# Altium PCB EnvUnitPCB.PcbDoc (part 3 of 4)
Units mm, origin at the board's own origin, x right, y up, seen from the top; angles counter-clockwise.
Board outline 110.5 x 67 mm, 4 copper layers (TOP, GND, VCC, BOT), stack 1.586 mm thick; 184 components, 135 nets, 655 pads, 1338 vias.
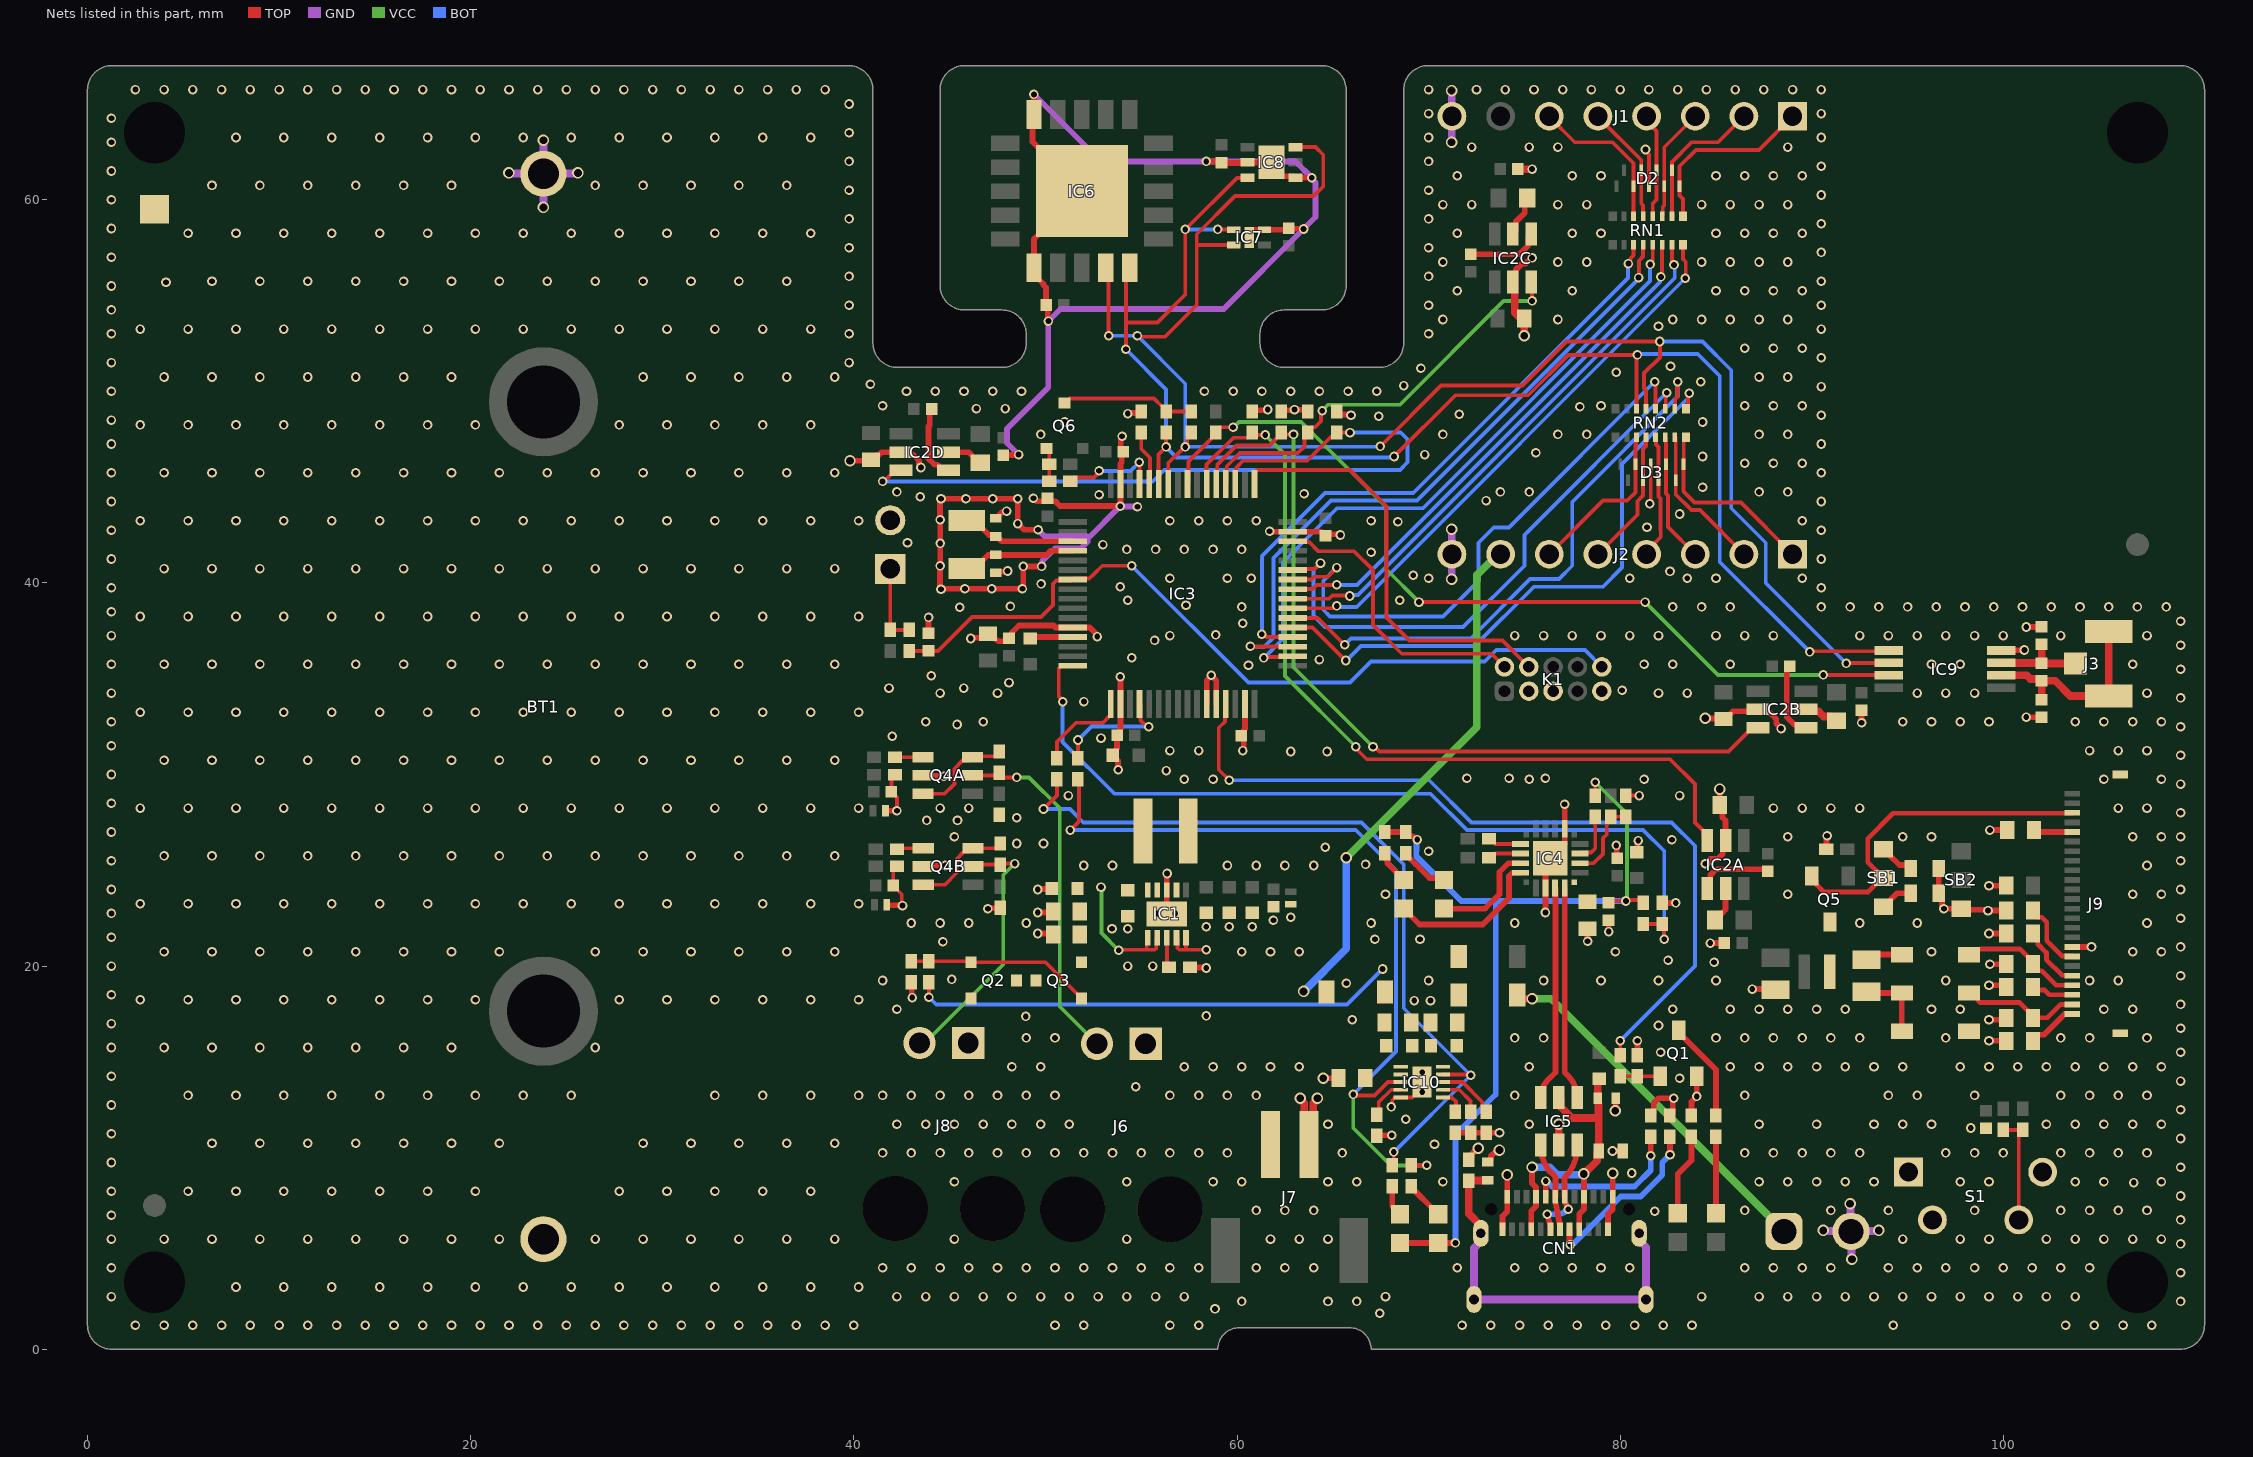
[diagram p5: the nets of this part, all layers, seen from the top]

## Via types
v1: diameter 0.5, hole 0.3, TOP to BOT, tented both sides, 1301 vias
v2: diameter 0.6, hole 0.4, TOP to BOT, tented both sides, 37 vias

## Nets (pads, with @x,y where several pads share a name; then routed paths per layer and width w, separated by ;. In a path a pad name is that pad's centre, name@x,y a point inside that pad or via, vN(x,y) a via of type N, cw(c..) or ccw(c..) an arc to the next point about the centre after c; other vN are vias at no path point) (continued)
GND: *BM1.1 BT1.MH2 C1.1 C2.2 C3.2 C4.2 C5.2 C6A.1 C6B.1 C6C.1 C6D.1 C8A.1 C8B.1 C8C.1 C8D.1 C9.2 C10.1 C11.1 C12.1 C13.1 C14.1 C15.2 C16.2 C17.1 C18.1 C19.2 C20.1 C21.1 C22.2 C23.1 C24.1 C25.1 C26.1 C28.2 C29.1 C30.1 C31.2 C32.2 C33.2 C34.2 C35.2 C36.2 C37.2 C38.2 C39A.1 C39B.1 C41.2 C42.2 C43.2 C44.2 C45.2 C46.2 C47.2 C48.2 C49.2 C50.1 C51.2 CN1.A1 CN1.A12 CN1.B1 CN1.B12 D1.2 D2.3 D3.3 D6.2 D11A.2 D11B.2 D14.1 IC1.4 IC1.5 IC1.8 IC1.11 IC2A.2 IC2B.2 IC2C.2 IC2D.2 IC3.12 IC3.18 IC3.27 IC3.28 IC3.31 IC3.47 IC3.63 IC4.3 IC4.12 IC4.21 IC5.2 IC6.6 IC6.20 IC6.21 IC7.4 IC7.5 IC8.2 IC8.4 IC8.7 IC9.4 IC10.5 IC10.11 J1.8 J2.8 J4.2 J5.2 J7.2 J9.17 J9.MP1 J9.MP2 K1.3 K1.5 K1.9 Q1.2 Q4A.5 Q4B.5 R1.1 R3.1 R4.1 R5.1 R11.1 R24.1 R27.2 R29.1 R30.1 R31.1 R32.1 R33.1 R34.2 R35.2 R36.1 R37.2 R40A.1 R40B.1 R41A.1 R41B.1 R42.1 R43.1 R44.1 R45.1 R46.2 S1.1 S1.2 S1.4 SB2.3 | length 245.9
  TOP w0.2: C39A.1@41.96,29.092 41.96,29.09 42.25,28.8 v1(42.25,28.114) ; C39A.1@41.96,29.1 41.96,29.81 R41A.1@42.15,30 ; R41B.1@42.25,25.2 42.06,25.01 C39B.1@42.06,24.2 42.06,24.19 42.5,23.75 v1@42.5,23.2 ; IC1.4@56.839,21.472 56.889,21.422 56.889,20.948 56.987,20.85 57.3,20.85 ; IC1.5@57.339,21.472 57.339,20.889 57.3,20.85 ; v1(58.4,20.85) 57.3,20.85 ; v1(68.05,12.65) 68.101,12.701 68.101,13.001 68.25,13.15 IC10.5@68.55,13.15 69.15,13.15 69.423,13.423 v1(69.675,13.423) ; R11.1@80.3,28.9 v1(81,28.9) ; v1(81.324,62.624) 81.324,62.543 81.5,62.367 81.5,61.974 D2.3@81.5,60.676 ; v1(81.55,44.135) 81.6,44.185 D3.3@81.6,46.2
  TOP w0.3: v2(39.8,46.375) 40.85,46.375 C6D.1@40.9,46.425 41.125,46.65 41.27,46.65 41.445,46.825 IC2D.2@42.45,46.825 42.6,46.675 43.076,46.675 43.12,46.675 43.4,46.395 43.4,46.179 43.5,46.079 v1(43.5,46.025) ; D11A.2@41.65,28.1 41.657,28.107 42.243,28.107 v1(42.25,28.114) ; D11B.2@41.725,23.2 41.744,23.181 42.519,23.181 v1(42.539,23.161) ; R29.1@42.999,19.151 43.022,19.128 43.022,18.378 v1(43.045,18.355) ; Q4A.5@43.6,29.95 43.625,29.925 44.675,29.925 v1(44.7,29.9) ; Q4B.5@43.625,25.2 43.675,25.25 v1(44.775,25.25) ; C30.1@43.9,37.37 v1(43.9,38.2) ; v1(44.5,40.888) 44.5,39.779 44.55,39.729 v1(44.55,39.675) 44.575,39.7 v1(45.8,39.7) v1(47.2,39.7) v1(48.8,39.7) 48.838,39.738 v1(48.838,40.86) 48.838,40.887 48.865,40.86 v1(49.8,40.86) ; v1@44.513,40.888 v1(44.513,42.062) 44.506,42.069 44.506,43.294 v1(44.5,43.3) 44.5,44.296 44.55,44.346 v1(44.55,44.4) v1(45.85,44.4) v1(47.25,44.4) v1(48.55,44.4) ; v1(46.1,37.1) 46.138,37.138 46.788,37.138 C17.1@47,37.35 ; v1(47,23) 47.025,23.025 47.625,23.025 R40B.1@47.65,23.05 ; C17.1@47.095,37.25 47.296,37.125 47.577,36.95 47.94,36.95 C18.1@48.1,37.11 48.11,37.11 48.26,37.26 48.26,37.414 48.621,37.775 50.425,37.775 50.525,37.675 IC3.12@51.427,37.675 52.309,37.675 52.662,37.323 52.662,37.238 v1(52.7,37.2) ; C16.2@47.4,40.54 47.447,40.587 47.987,40.587 v1(48.025,40.625) ; C15.2@47.4,43.36 47.41,43.36 47.762,43.712 47.937,43.712 v1(47.975,43.75) ; C8D.1@47.8,46.665 47.817,46.683 48.583,46.683 v1(48.6,46.7) ; v1@48.554,44.396 v1(48.554,43.1) 48.879,42.775 v1(49.616,42.775) ; v1(49.375,44.425) 49.532,44.268 50.242,44.268 50.25,44.26 50.515,44.26 50.76,44.015 53.915,44.015 IC3.63@53.915,45.163 53.915,46.215 53.982,46.282 53.982,46.772 C12.1@54.06,46.85 53.926,46.984 53.926,47.522 54,47.596 v1(54,47.65) ; v1(49.4,65.5) 49.4,64.65 49.324,64.574 49.324,63.026 50.7,61.65 IC6.21@50.7,61.45 ; v1(49.6,21.7) 50.35,21.7 C32.2@50.4,21.65 ; v1(49.6,22.8) 50.35,22.8 C33.2@50.4,22.85 ; v1(49.6,24) 49.625,24.025 50.3,24.025 C31.2@50.325,24.05 ; C10.1@50.092,44.417 C10.1@50.1,44.41 ; v1(50.154,53.665) 50.116,53.704 50.116,54.414 50.03,54.5 50.03,55.425 49.9,55.555 49.9,55.6 49.4,56.1 IC6.6@49.4,56.45 49.4,57.95 IC6.21@51.9,60.45 ; v1(53.8,30.25) 53.784,30.266 53.784,30.716 53.525,30.975 C9.2@53.525,31 53.7,31.175 53.7,31.336 53.74,31.376 C13.1@53.74,32.05 53.89,32.2 53.89,32.361 53.915,32.386 IC3.18@53.915,33.687 53.915,35.085 v1(53.9,35.1) ; v1(53.9,44) v1@53.912,43.988 ; v1(54.3,48.838) 54.338,48.876 54.926,48.876 R3.1@55,48.95 ; v1@54.788,43.988 v1(54.8,43.975) ; v1(55.85,22.75) 56.047,22.75 56.075,22.722 IC1.11@56.339,22.722 IC1.8@56.339,23.972 56.339,24.821 v1(56.35,24.832) ; R1.1@57.55,19.95 57.575,19.925 58.375,19.925 v1(58.4,19.9) ; v1(58.4,62) 59.25,62 59.33,61.92 60.52,61.92 IC8.2@60.55,61.95 IC8.7@61.8,61.95 61.8,61.755 62.325,61.23 62.52,61.23 62.525,61.225 62.975,61.225 IC8.4@63.05,61.15 v1(63.9,61.15) ; IC3.27@58.415,33.687 58.415,34.911 58.657,35.153 v1(58.657,35.186) 58.657,35.168 58.915,34.911 IC3.28@58.915,33.687 ; C11.1@60.201,32.05 60.351,32.2 60.351,32.322 60.415,32.386 IC3.31@60.415,33.687 ; C11.1@60.229,32.022 60.346,31.905 60.346,31.35 60.3,31.304 v1(60.3,31.25) ; IC7.5@60.637,58.041 IC7.5@60.637,58.041 60.637,58.341 60.737,58.441 IC7.4@61.437,58.441 62.631,58.441 C24.1@62.682,58.492 ; R33.1@60.8,48.95 60.863,49.013 61.562,49.013 v1(61.6,49.051) ; v1(61.7,42.7) 61.725,42.675 IC3.47@62.903,42.675 64.409,42.675 64.618,42.467 C14.1@64.628,42.467 64.708,42.547 65.299,42.547 65.346,42.5 v1(65.4,42.5) ; R32.1@62.3,48.95 62.362,49.012 62.962,49.012 v1(63,49.05) ; C24.1@62.7,58.51 C24.1@62.682,58.492 ; v1(63,49.05) 63.017,49.034 63.616,49.034 R31.1@63.7,48.95 ; v1(63.476,58.474) 63.458,58.492 C24.1@62.682,58.492 ; v2(64.5,14.15) C38.2@65.3,14.15 ; R30.1@65.213,48.862 65.287,48.788 65.912,48.788 v1(65.95,48.75) ; R34.2@67.3,11.15 67.325,11.175 v1(68.075,11.175) ; R37.2@71.4,11.3 R36.1@72.2,11.3 R35.2@73,11.3 v1(73.7,11.3) ; R46.2@72.1,9.9 72.25,10.05 72.25,10.174 72.576,10.5 v2(72.6,10.5) ; C51.2@73.1,9.775 73.175,9.775 73.25,9.85 73.25,10.074 73.518,10.343 73.643,10.343 v2(73.7,10.4) ; CN1.B12@73.86,6.26 73.86,6.945 74.11,7.195 CN1.A1@74.11,7.96 74.11,9.09 v2(74.1,9.1) ; IC2C.2@74.5,55.609 74.551,55.66 74.551,56.351 74.858,56.658 75.04,56.658 75.346,56.963 v1(75.4,56.963) ; v1(76.1,22.8) 76.103,22.803 IC4.3@76.103,24.075 76.103,25.375 IC4.21@76.353,25.625 77.103,26.375 77.103,26.787 IC4.12@77.103,27.175 77.103,28.447 v1(77.1,28.45) ; IC5.2@76.682,10.768 IC5.2@76.8,10.65 ; v1(78.3,21.3) C22.2@78.3,21.95 ; CN1.B1@79.36,6.26 79.36,7.06 79.61,7.31 CN1.A12@79.61,7.96 79.61,9.19 v2(79.607,9.193) ; v1(79.4,21.8) C21.1@79.4,22.39 ; v1(79.6,10.35) D6.2@80.125,10.35 ; v2(79.75,12.45) 79.762,12.462 79.762,13.087 C50.1@79.775,13.1 ; v1(79.8,26.3) 79.824,26.276 79.824,25.736 C20.1@79.875,25.685 ; C19.2@80.875,25.95 80.906,25.981 80.906,26.519 v1(80.937,26.55) ; R24.1@80.9,15.35 v1(80.9,16.1) ; R4.1@81.6,12.2 81.75,12.35 81.75,12.85 82,13.1 v1(82.8,13.1) 82.8,13.046 82.75,12.996 82.75,12.35 R5.1@82.6,12.2 ; R45.1@82.2,23.3 v1(82.9,23.3) ; R27.2@83.717,12.2 83.717,12.917 v1(84,13.2) Q1.2@84,14.25 ; v1(84.453,25.347) 84.476,25.347 84.729,25.6 85.102,25.6 85.35,25.848 85.35,25.924 85.35,26.4 IC2A.2@85.5,26.55 85.5,27.6 85.341,27.759 85.341,28.359 C6A.1@85.2,28.5 ; v2@84.455,32.921 C6B.1@85.379,32.921 ; v1(84.7,21.2) C8A.1@85.44,21.2 ; C6A.1@85.2,28.4 C6A.1@85.2,28.5 ; v2(85.2,29.243) C6A.1@85.2,28.5 ; C6B.1@85.57,32.975 85.895,33.3 IC2B.2@87.1,33.3 ; v1(86.9,18.8) 88.07,18.8 C41.2@88.1,18.77 ; IC2B.2@87.2,33.4 IC2B.2@87.1,33.3 ; v1(88.4,32.4) 88.4,32.426 88.15,32.676 88.15,32.895 87.945,33.1 87.795,33.25 87.15,33.25 IC2B.2@87.1,33.3 ; R43.1@90.75,26.1 90.775,26.125 90.775,26.775 v1(90.8,26.8) ; v1(92.6,32.7) C8B.1@92.6,33.35 ; R42.1@96.625,25.1 R44.1@96.625,23.8 96.8,23.625 96.8,23.131 96.9,23.031 v1(96.9,23) SB2.3@97.8,23 97.862,22.938 99.162,22.938 v1(99.2,22.9) C44.2@100.15,22.9 ; v1(99.25,16.1) C49.2@100.15,16.1 ; v1(99.25,17.2) 100.05,17.2 C48.2@100.15,17.3 ; v1(99.25,19) 100.05,19 C47.2@100.15,18.9 ; v1(99.25,21.7) C45.2@100.15,21.7 ; v1(99.25,24.2) C43.2@100.15,24.2 ; v1(99.3,20.1) C46.2@100.15,20.1 ; v1(99.3,27.1) C42.2@100.2,27.1 ; IC9.4@99.888,36.475 99.9,36.487 101.087,36.487 v1(101.1,36.5) ; v1(101.2,33) 101.205,32.995 101.995,32.995 C26.1@102,32.99 ; v1(101.2,37.7) 101.205,37.705 101.995,37.705 C28.2@102,37.71 ; J9.17@103.6,21 v1(104.6,21)
  TOP w0.4: v2(63.3,13.1) 63.3,13.046 63.517,12.829 63.517,10.933 J7.2@63.75,10.7 63.983,10.933 63.983,12.829 64.187,13.033 v2@64.187,13.1 ; IC2C.2@74.401,55.708 74.5,55.609 74.5,54.095 C6C.1@75,53.595 ; C8C.1@74.66,61.6 v1(75.4,61.6) ; v2(75,52.9) C6C.1@75,53.8 C6C.1@75,53.895 ; IC5.2@76.8,10.65 v2(76.8,11.75)
  GND w0.3: v1(48.6,46.7) 48,47.3 48,48.049 50.15,50.199 50.15,53.661 v1(50.154,53.665) 50.793,54.304 59.305,54.304 v1(63.476,58.474) 64.1,59.099 64.1,60.896 63.9,61.096 v1(63.9,61.15) 63.05,62 v1(58.4,62) 52.9,62 v1(49.4,65.5) ; v1(49.616,42.775) 49.966,42.425 52.2,42.425 52.2,42.3 ; v1(49.8,40.86) 49.838,40.898 49.838,41.138 50.5,41.8 51.849,41.8 52.2,42.151 52.2,42.3 ; v1(54.8,43.975) 54.788,43.988 53.912,43.988 v1(53.9,44) 52.2,42.3
  GND w0.4: v2(22,61.4) 22.025,61.375 23.775,61.375 BT1.MH2@23.8,61.35 ; v2(23.8,59.6) BT1.MH2@23.8,61.35 ; v2(23.8,63.1) BT1.MH2@23.8,61.35 ; v2(25.6,61.4) 25.575,61.375 23.825,61.375 BT1.MH2@23.8,61.35 ; v2(71.2,40.2) 71.21,40.21 71.21,41.49 J2.8@71.22,41.5 71.21,41.51 71.21,42.79 v2(71.2,42.8) ; v2(71.2,63) 71.21,63.01 71.21,64.35 J1.8@71.22,64.36 71.21,64.37 71.21,65.69 v2(71.2,65.7) ; v2(90.6,6.2) 90.625,6.175 J5.2@92.025,6.175 ; v2(92,7.6) 92.025,7.575 J5.2@92.025,6.175 ; v2(92.1,4.7) 92.075,4.725 92.075,6.125 J5.2@92.05,6.15 ; v2(93.5,6.2) 93.475,6.175 92.075,6.175 J5.2@92.05,6.15 ; J5.2@92.025,6.175 J5.2@92.05,6.15
  BOT w0.3: v1(53.9,44) v1@53.912,43.988 ; v1@54.788,43.988 v1(54.8,43.975)
  other v1: 2.5,1.25 4,1.25 5.5,1.25 7,1.25 8.5,1.25 10,1.25 11.5,1.25 13,1.25 14.5,1.25 16,1.25 17.5,1.25 19,1.25 20.5,1.25 22,1.25 23.5,1.25 25,1.25 26.5,1.25 28,1.25 29.5,1.25 31,1.25 32.5,1.25 34,1.25 35.5,1.25 37,1.25 38.5,1.25 40,1.25 50.5,1.25 52,1.25 56.5,1.25 58,1.25 71.75,1.25 73.25,1.25 74.75,1.25 76.25,1.25 77.75,1.25 79.25,1.25 80.75,1.25 82.25,1.25 83.75,1.25 94.25,1.25 103.25,1.25 104.75,1.25 106.25,1.25 107.75,1.25 67.445,1.88 58.849,2.105 60.25,2.5 64.75,2.5 66.25,2.5 109.25,2.5 1.25,2.75 42.25,2.75 43.75,2.75 45.25,2.75 46.75,2.75 48.25,2.75 49.75,2.75 51.25,2.75 52.75,2.75 54.25,2.75 55.75,2.75 57.25,2.75 67.75,2.75 84.25,2.75 87.25,2.75 88.75,2.75 90.25,2.75 91.75,2.75 93.25,2.75 94.75,2.75 96.25,2.75 97.75,2.75 99.25,2.75 100.75,2.75 102.25,2.75 103.75,2.75 7.75,3.25 10.25,3.25 12.75,3.25 15.25,3.25 17.75,3.25 20.25,3.25 22.75,3.25 25.25,3.25 27.75,3.25 30.25,3.25 32.75,3.25 35.25,3.25 37.75,3.25 40.25,3.25 109.25,4 1.25,4.25 41.5,4.25 43,4.25 44.5,4.25 46,4.25 47.5,4.25 49,4.25 50.5,4.25 52,4.25 53.5,4.25 55,4.25 56.5,4.25 58,4.25 61,4.25 62.5,4.25 64,4.25 71.5,4.25 74.5,4.25 76,4.25 77.5,4.25 79,4.25 80.5,4.25 86.5,4.25 88,4.25 89.5,4.25 91,4.25 94,4.25 95.5,4.25 97,4.25 98.5,4.25 100,4.25 101.5,4.25 103,4.25 104.5,4.25 109.25,5.5 1.25,5.75 4,5.75 6.5,5.75 9,5.75 11.5,5.75 14,5.75 16.5,5.75 19,5.75 21.5,5.75 26.5,5.75 29,5.75 31.5,5.75 34,5.75 36.5,5.75 39,5.75 45.25,5.75 54.25,5.75 61.75,5.75 63.25,5.75 64.75,5.75 94.75,5.75 97.75,5.75 99.25,5.75 102.25,5.75 103.75,5.75 105.25,5.75 106.75,5.75 108.25,5.75 109.25,6.75 1.25,7 81.811,7.206 61,7.25 62.5,7.25 64,7.25 86.5,7.25 91,7.25 94,7.25 98.5,7.25 103,7.25 104.5,7.25 106,7.25 107.5,7.25 109.25,8 1.25,8.25 5.25,8.25 7.75,8.25 10.25,8.25 12.75,8.25 15.25,8.25 17.75,8.25 20.25,8.25 27.75,8.25 30.25,8.25 32.75,8.25 35.25,8.25 37.75,8.25 106.8,8.7 45.25,8.75 54.25,8.75 58.75,8.75 60.25,8.75 64.75,8.75 66.25,8.75 70.75,8.75 87.25,8.75 88.75,8.75 90.25,8.75 91.75,8.75 93.25,8.75 97.75,8.75 99.25,8.75 103.75,8.75 105.25,8.75 108.25,8.75 80.6,9.2 109.25,9.5 1.25,9.75 41.5,10.25 43,10.25 44.5,10.25 46,10.25 47.5,10.25 49,10.25 50.5,10.25 52,10.25 53.5,10.25 55,10.25 56.5,10.25 58,10.25 59.5,10.25 65.5,10.25 86.5,10.25 88,10.25 89.5,10.25 91,10.25 92.5,10.25 97,10.25 98.5,10.25 100,10.25 103,10.25 104.5,10.25 106,10.25 107.5,10.25 70.311,10.706 6.5,10.75 9,10.75 11.5,10.75 14,10.75 16.5,10.75 19,10.75 21.5,10.75 29,10.75 31.5,10.75 34,10.75 36.5,10.75 39,10.75 109.25,11 1.25,11.25 98.3,11.55 42.25,11.75 43.75,11.75 45.25,11.75 46.75,11.75 48.25,11.75 49.75,11.75 51.25,11.75 64.75,11.75 75.25,11.75 87.25,11.75 90.25,11.75 93.25,11.75 94.75,11.75 96.25,11.75 102.25,11.75 103.75,11.75 105.25,11.75 106.75,11.75 108.25,11.75 68.811,12.006 109.25,12.5 1.25,12.75 5.25,13.25 7.75,13.25 10.25,13.25 12.75,13.25 15.25,13.25 17.75,13.25 20.25,13.25 22.75,13.25 25.25,13.25 32.75,13.25 35.25,13.25 37.75,13.25 40.25,13.25 41.5,13.25 43,13.25 44.5,13.25 46,13.25 47.5,13.25 49,13.25 50.5,13.25 56.5,13.25 58,13.25 59.5,13.25 61,13.25 74.5,13.25 86.5,13.25 94,13.25 95.5,13.25 98.5,13.25 103,13.25 104.5,13.25 106,13.25 107.5,13.25 54.711,13.706 109.25,14 83.1,14.15 1.25,14.25 69.675,14.462 48.25,14.75 49.75,14.75 57.25,14.75 58.75,14.75 60.25,14.75 61.75,14.75 63.25,14.75 75.25,14.75 85.75,14.75 87.25,14.75 88.75,14.75 90.25,14.75 91.75,14.75 93.25,14.75 94.75,14.75 97.75,14.75 99.25,14.75 100.75,14.75 102.25,14.75 103.75,14.75 105.25,14.75 106.75,14.75 108.25,14.75 82.111,15.506 109.25,15.5 1.25,15.75 4,15.75 6.5,15.75 9,15.75 11.5,15.75 14,15.75 16.5,15.75 19,15.75 26.5,15.75 49,16.25 50.5,16.25 74.5,16.25 76,16.25 85,16.25 86.5,16.25 88,16.25 89.5,16.25 91,16.25 92.5,16.25 97,16.25 103,16.25 104.5,16.25 107.5,16.25 109.25,16.75 82,16.9 1.25,17 66.011,17.206 48.975,17.375 58.4,17.4 42.25,17.75 82.75,17.75 85.75,17.75 87.25,17.75 88.75,17.75 90.25,17.75 91.75,17.75 96.25,17.75 97.75,17.75 105.25,17.75 106.75,17.75 109.25,18 69.25,18.2 70.1,18.2 2.75,18.25 5.25,18.25 7.75,18.25 10.25,18.25 12.75,18.25 15.25,18.25 17.75,18.25 20.25,18.25 27.75,18.25 30.25,18.25 32.75,18.25 35.25,18.25 37.75,18.25 40.25,18.25 1.25,18.5 65.711,19.106 41.5,19.25 70,19.25 76,19.25 79,19.25 82,19.25 85,19.25 97,19.25 104.5,19.25 106,19.25 45.111,19.306 109.25,19.5 1.25,20 54.3,20 55.6,20 84.9,20.2 82.5,20.3 4,20.75 6.5,20.75 9,20.75 11.5,20.75 14,20.75 16.5,20.75 19,20.75 21.5,20.75 26.5,20.75 29,20.75 31.5,20.75 34,20.75 36.5,20.75 39,20.75 60.25,20.75 61.75,20.75 63.25,20.75 79.75,20.75 96.25,20.75 106.75,20.75 108.25,20.75 109.25,21 44.65,21.275 67.2,21.4 69.55,21.4 1.25,21.5 53.475,21.95 54.3,21.95 58.4,22.05 59.6,22.05 60.8,22.05 43,22.25 44.5,22.25 46,22.25 49,22.25 67,22.25 74.5,22.25 92.5,22.25 95.5,22.25 107.5,22.25 61.9,22.4 109.25,22.5 62.8,22.55 1.25,22.75 56.775,22.75 2.75,23.25 5.25,23.25 7.75,23.25 10.25,23.25 12.75,23.25 15.25,23.25 17.75,23.25 20.25,23.25 22.75,23.25 25.25,23.25 27.75,23.25 30.25,23.25 32.75,23.25 35.25,23.25 37.75,23.25 40.25,23.25 67.75,23.75 88.75,23.75 106.75,23.75 108.25,23.75 1.25,24 109.25,24 52,25.25 53.5,25.25 59.5,25.25 61,25.25 62.5,25.25 64,25.25 107.5,25.25 66.711,25.306 1.25,25.5 109.25,25.5 4,25.75 6.5,25.75 9,25.75 11.5,25.75 14,25.75 16.5,25.75 19,25.75 21.5,25.75 24,25.75 26.5,25.75 29,25.75 31.5,25.75 34,25.75 36.5,25.75 39,25.75 70,26 64.611,26.206 48.5,26.4 49.9,26.4 82.7,26.6 45.25,26.75 88.75,26.75 94.75,26.75 96.25,26.75 106.75,26.75 108.25,26.75 109.25,26.75 1.25,27 43.811,27.606 45.411,27.606 48.5,27.75 109.25,28 2.75,28.25 5.25,28.25 7.75,28.25 10.25,28.25 12.75,28.25 15.25,28.25 17.75,28.25 20.25,28.25 22.75,28.25 25.25,28.25 27.75,28.25 30.25,28.25 32.75,28.25 35.25,28.25 37.75,28.25 40.25,28.25 44.5,28.25 46,28.25 88,28.25 89.5,28.25 91,28.25 92.5,28.25 106,28.25 107.5,28.25 1.25,28.5 51.2,28.9 83.1,28.9 109.25,29.5 57.25,29.75 58.75,29.75 75.25,29.75 81.25,29.75 105.25,29.75 108.25,29.75 72,29.8 74.2,29.8 76.1,29.8 1.25,30 56.311,30.206 4,30.75 6.5,30.75 9,30.75 11.5,30.75 14,30.75 16.5,30.75 19,30.75 21.5,30.75 24,30.75 26.5,30.75 29,30.75 31.5,30.75 34,30.75 36.5,30.75 39,30.75 109.25,31 62.8,31.2 64.7,31.2 56.5,31.25 58,31.25 104.5,31.25 106,31.25 107.5,31.25 1.25,31.5 52.9,31.9 42,32 109.25,32.5 45.389,32.611 1.25,32.75 43.75,32.75 46.75,32.75 94.75,32.75 96.25,32.75 97.75,32.75 99.25,32.75 103.75,32.75 105.25,32.75 106.75,32.75 108.25,32.75 2.75,33.25 5.25,33.25 7.75,33.25 10.25,33.25 12.75,33.25 15.25,33.25 17.75,33.25 20.25,33.25 22.75,33.25 25.25,33.25 27.75,33.25 30.25,33.25 32.75,33.25 35.25,33.25 37.75,33.25 40.25,33.25 52.011,33.806 109.25,34 1.25,34.25 44.5,34.25 47.5,34.25 82,34.25 83.5,34.25 95.5,34.25 97,34.25 98.5,34.25 107.5,34.25 80.1,34.4 41.836,34.514 45.736,34.514 48.1,34.8 44.039,35.161 109.25,35.5 60.6,35.7 1.25,35.75 4,35.75 6.5,35.75 9,35.75 11.5,35.75 14,35.75 16.5,35.75 19,35.75 21.5,35.75 24,35.75 26.5,35.75 29,35.75 31.5,35.75 34,35.75 36.5,35.75 39,35.75 81.25,35.75 82.75,35.75 85.75,35.75 96.25,35.75 97.75,35.75 106.75,35.75 64.3,36 54.5,36.1 109.25,36.75 55.7,37 1.25,37.25 56.5,37.25 74.5,37.25 76,37.25 77.5,37.25 79,37.25 80.5,37.25 82,37.25 85,37.25 86.5,37.25 88,37.25 92.5,37.25 94,37.25 95.5,37.25 97,37.25 98.5,37.25 100,37.25 103,37.25 107.5,37.25 58.891,37.287 60.3,37.9 109.25,38 2.75,38.25 5.25,38.25 7.75,38.25 10.25,38.25 12.75,38.25 15.25,38.25 17.75,38.25 20.25,38.25 22.75,38.25 25.25,38.25 27.75,38.25 30.25,38.25 32.75,38.25 35.25,38.25 37.75,38.25 40.25,38.25 1.25,38.5 45.525,38.725 60.25,38.75 82.75,38.75 84.25,38.75 85.75,38.75 90.5,38.75 92,38.75 93.5,38.75 95,38.75 96.5,38.75 98,38.75 99.5,38.75 101,38.75 102.5,38.75 104,38.75 105.5,38.75 107,38.75 108.5,38.75 48.175,38.775 57.339,38.839 54.3,39.1 68.5,39.1 1.25,39.75 90.5,39.75 53.911,39.806 49.775,39.95 56.5,40.25 59.5,40.25 60.747,40.25 70,40.25 80.5,40.25 83.5,40.25 85,40.25 89.5,40.25 69.2,40.4 82.6,40.6 4,40.75 6.5,40.75 9,40.75 11.5,40.75 14,40.75 16.5,40.75 19,40.75 21.5,40.75 24,40.75 26.5,40.75 29,40.75 31.5,40.75 34,40.75 36.5,40.75 39,40.75 1.25,41.25 90.5,41.25 67,41.6 54.25,41.75 55.75,41.75 57.25,41.75 58.75,41.75 60.25,41.75 53,42 42.8,42.1 1.25,42.75 90.5,42.75 81.4,42.9 68.4,43.2 2.75,43.25 5.25,43.25 7.75,43.25 10.25,43.25 12.75,43.25 15.25,43.25 17.75,43.25 20.25,43.25 22.75,43.25 25.25,43.25 27.75,43.25 30.25,43.25 32.75,43.25 35.25,43.25 37.75,43.25 40.25,43.25 56.5,43.25 58,43.25 59.5,43.25 61,43.25 67,43.25 89.5,43.25 83.1,43.6 1.25,44.25 90.5,44.25 73,44.3 43.461,44.496 52.8,44.6 63.5,44.65 42.25,44.75 73.75,44.75 75.25,44.75 87.25,44.75 88.75,44.75 84.3,45 1.25,45.75 4,45.75 6.5,45.75 9,45.75 11.5,45.75 14,45.75 16.5,45.75 19,45.75 21.5,45.75 24,45.75 26.5,45.75 29,45.75 31.5,45.75 34,45.75 36.5,45.75 39,45.75 90.5,45.75 86.5,46.25 88,46.25 89.5,46.25 84.3,46.6 69.8,46.7 75.6,46.8 1.25,47.25 90.5,47.25 49.75,47.75 70.75,47.75 76.75,47.75 78.25,47.75 87.25,47.75 88.75,47.75 2.75,48.25 5.25,48.25 7.75,48.25 10.25,48.25 12.75,48.25 15.25,48.25 17.75,48.25 20.25,48.25 27.75,48.25 30.25,48.25 32.75,48.25 35.25,48.25 37.75,48.25 51,48.4 84.3,48.4 1.25,48.5 67.4,48.7 90.5,48.75 71.6,48.8 46.4,49.1 47.9,49.1 77.9,49.2 41.5,49.25 79,49.25 86.5,49.25 88,49.25 89.5,49.25 1.25,50 42.75,50 44.25,50 45.75,50 47.25,50 48.75,50 58.3,50 59.8,50 61.3,50 62.8,50 64.3,50 65.8,50 67.3,50 90.5,50.25 68.7,50.3 40.865,50.373 84.2,50.5 4,50.75 6.5,50.75 9,50.75 11.5,50.75 14,50.75 16.5,50.75 19,50.75 29,50.75 31.5,50.75 34,50.75 36.5,50.75 39,50.75 87.25,50.75 88.75,50.75 79.8,51 69.6,51.2 82.625,51.307 1.25,51.5 39.75,51.5 90.5,51.75 86.5,52.25 88,52.25 89.5,52.25 1.25,53 39.75,53 70,53 2.75,53.25 5.25,53.25 7.75,53.25 10.25,53.25 12.75,53.25 15.25,53.25 17.75,53.25 20.25,53.25 22.75,53.25 25.25,53.25 27.75,53.25 30.25,53.25 32.75,53.25 35.25,53.25 37.75,53.25 90.5,53.25 82,53.4 70.75,53.75 76.75,53.75 82.75,53.75 84.25,53.75 85.75,53.75 87.25,53.75 88.75,53.75 1.25,54.25 39.75,54.5 70,54.5 90.5,54.5 71.5,55.25 77.5,55.25 85,55.25 86.5,55.25 88,55.25 89.5,55.25 1.25,55.5 4.1,55.7 6.5,55.75 9,55.75 11.5,55.75 14,55.75 16.5,55.75 19,55.75 21.5,55.75 24,55.75 26.5,55.75 29,55.75 31.5,55.75 34,55.75 36.5,55.75 90.5,55.75 39.75,56 70,56 70.75,56.75 76.75,56.75 78.25,56.75 84.25,56.75 85.75,56.75 87.25,56.75 88.75,56.75 1.25,57 90.5,57.25 39.75,57.5 70,57.5 5.25,58.25 7.75,58.25 10.25,58.25 12.75,58.25 15.25,58.25 17.75,58.25 20.25,58.25 22.75,58.25 25.25,58.25 27.75,58.25 30.25,58.25 32.75,58.25 35.25,58.25 37.75,58.25 71.5,58.25 77.5,58.25 79,58.25 85,58.25 86.5,58.25 88,58.25 89.5,58.25 1.25,58.5 90.5,58.75 39.75,59 70,59 70.75,59.75 72.25,59.75 76.75,59.75 78.25,59.75 84.25,59.75 85.75,59.75 87.25,59.75 88.75,59.75 1.25,60 90.5,60.25 39.75,60.5 70,60.5 6.5,60.75 9,60.75 11.5,60.75 14,60.75 16.5,60.75 19,60.75 26.5,60.75 29,60.75 31.5,60.75 34,60.75 36.5,60.75 71.5,61.25 77.5,61.25 79,61.25 85,61.25 86.5,61.25 88,61.25 89.5,61.25 1.25,61.5 90.5,61.75 39.75,62 70,62 72.25,62.75 75.25,62.75 76.75,62.75 88.75,62.75 1.25,63 7.75,63.25 10.25,63.25 12.75,63.25 15.25,63.25 17.75,63.25 20.25,63.25 22.75,63.25 25.25,63.25 27.75,63.25 30.25,63.25 32.75,63.25 35.25,63.25 37.75,63.25 70,63.25 90.5,63.25 39.75,63.5 1.25,64.25 70,64.5 90.5,64.5 39.75,65 2.5,65.75 4,65.75 5.5,65.75 7,65.75 8.5,65.75 10,65.75 11.5,65.75 13,65.75 14.5,65.75 16,65.75 17.5,65.75 19,65.75 20.5,65.75 22,65.75 23.5,65.75 25,65.75 26.5,65.75 28,65.75 29.5,65.75 31,65.75 32.5,65.75 34,65.75 35.5,65.75 37,65.75 38.5,65.75 70,65.75 72.5,65.75 74,65.75 75.5,65.75 77,65.75 78.5,65.75 80,65.75 81.5,65.75 83,65.75 84.5,65.75 86,65.75 87.5,65.75 89,65.75 90.5,65.75
  other v2: 64.2,13.1 84.434,32.943
GPO: IC3.56 IC9.7 R22.1 | length 46.1
  TOP w0.2: IC3.56@57.415,45.163 57.465,45.213 57.465,46.34 58.9,47.775 58.9,47.925 59.1,48.125 v1(59.797,48.125) ; v1(69.5,39) v1(81.3,39) ; v1(90.6,35.2) 90.612,35.188 93.999,35.188 IC9.7@94.012,35.175
  VCC w0.2: v1(59.797,48.125) 59.822,48.125 60.097,48.4 63.35,48.4 67.787,43.963 67.787,40.713 v1(69.5,39) ; v1(81.3,39) 85.1,35.2 v1(90.6,35.2)
H_CS: D2.4 J1.3 RN1.3 | length 5.9
  TOP w0.2: RN1.3@82.2,59.15 82.225,59.175 82.225,59.625 82.3,59.7 D2.4@82.3,60.7 82.3,62.74 J1.3@83.92,64.36
H_GPIO0: D2.5 J1.1 RN1.1 | length 9.8
  TOP w0.2: RN1.1@83.287,59.033 83.287,60.037 83.1,60.224 D2.5@83.1,60.7 83.1,61.55 83.1,61.75 83.95,62.6 87.24,62.6 J1.1@89,64.36
H_GPIO1: D3.1 J2.1 RN2.16 | length 9.9
  TOP w0.2: RN2.16@83.437,47.6 83.32,47.483 83.32,46.478 83.3,46.459 D3.1@83.3,46.2 83.3,44.781 83.881,44.2 86.3,44.2 J2.1@89,41.5
H_GPIO2: D3.9 J2.2 RN2.15 | length 7.8
  TOP w0.2: RN2.15@82.9,47.6 D3.9@82.9,45.35 82.9,44.616 83.716,43.8 84.16,43.8 J2.2@86.46,41.5
H_MISO: D2.8 J1.5 RN1.5 | length 6.2
  TOP w0.2: J1.5@78.825,64.345 81.1,62.07 D2.8@81.1,61.55 81.1,59.8 81.2,59.7 RN1.5@81.2,59.15
H_MOSI: D2.2 J1.6 RN1.6 | length 8.2
  TOP w0.2: J1.6@76.285,64.345 77.63,63 79.604,63 80.7,61.904 D2.2@80.7,60.7 RN1.6@80.7,59.15
H_RST: D2.6 J1.2 RN1.2 | length 7.6
  TOP w0.2: RN1.2@82.7,59.15 D2.6@82.7,61.55 82.7,61.974 83.726,63 85.1,63 J1.2@86.46,64.36
H_RX: D3.2 J2.3 RN2.14 | length 6.8
  TOP w0.2: RN2.14@82.35,47.6 82.375,47.575 82.375,47.291 82.4,47.266 D3.2@82.4,46.2 82.4,44.664 82.5,44.564 82.5,42.92 J2.3@83.92,41.5
H_SCK: D2.7 J1.4 RN1.4 | length 5.5
  TOP w0.2: J1.4@81.38,64.36 81.38,64.113 81.9,63.593 81.9,62.194 81.9,60.011 81.7,59.811 RN1.4@81.7,59.15
H_SCL: D3.7 J2.5 RN2.12 | length 7.1
  TOP w0.2: J2.5@78.84,41.5 80.9,43.56 80.9,44.263 81.2,44.563 81.2,47 81.35,47.15 RN2.12@81.35,47.6
H_SDA: D3.4 J2.6 RN2.11 | length 8.7
  TOP w0.2: J2.6@76.3,41.5 76.306,41.5 79.106,44.3 80.371,44.3 80.8,44.729 80.8,47.166 80.825,47.191 80.825,47.575 RN2.11@80.85,47.6
H_TX: D3.8 J2.4 RN2.13 | length 6.2
  TOP w0.2: J2.4@81.52,41.8 82.121,42.401 82.121,42.734 82.1,42.754 82.1,44.399 82,44.499 82,47.1 81.875,47.225 81.875,47.575 RN2.13@81.85,47.6
LED: IC3.29 R49.1 | length 42.6
  TOP w0.2: IC3.29@59.415,33.687 59.365,33.637 59.365,32.757 59.05,32.442 59.05,30.25 v1(59.6,29.7) ; R49.1@80,15.35 v1(80,16.1)
  BOT w0.2: v1(59.6,29.7) 70.034,29.7 72.234,27.5 82.684,27.5 83.9,26.284 83.9,20 v1(80,16.1)
LED_RX: IC4.19 LED2.1 | length 5.7
  TOP w0.3: LED2.1@70.8,23 72.949,23 73.7,23.751 73.7,24.906 74.169,25.375 IC4.19@74.803,25.375
LED_TX: IC4.20 LED1.1 | length 8.5
  TOP w0.3: LED1.1@68.475,23.075 68.625,23.075 69.025,22.675 69.525,22.175 72.831,22.175 74.2,23.544 74.2,24.699 74.376,24.875 IC4.20@74.803,24.875
NetC7A_1: C7A.1 IC2A.4 | length 3.9
  TOP w0.3: IC2A.4@84.55,24.05 84.7,24.2 84.7,24.676 84.7,24.745 85.005,25.05 87.59,25.05 C7A.1@87.7,24.94
NetC7B_1: C7B.1 IC2B.4 | length 3.9
  TOP w0.3: C7B.1@88.86,35.65 88.71,35.5 88.71,35.324 88.7,35.314 88.7,33 89.1,32.6 89.55,32.6 IC2B.4@89.7,32.45
NetC7C_1: C7C.1 IC2C.4 | length 3.8
  TOP w0.3: C7C.1@72.2,57.16 74.748,57.16 75.201,57.613 75.201,58.058 IC2C.4@75.351,58.208
NetC7D_1: C7D.1 IC2D.4 | length 4
  TOP w0.3: C7D.1@44.06,49.075 43.962,48.977 43.962,48.232 43.9,48.17 43.9,46.48 44.205,46.175 44.35,46.175 44.65,45.875 IC2D.4@44.95,45.875
NetC40_1: C40.1 D12.2 L2.2 Q5.3 | length 2
  TOP w0.3: C40.1@92.85,20.33 93.12,20.6 D12.2@94.7,20.6
NetC40_2: C40.2 D13.1 D14.2 | length 3.9
  TOP w0.3: C40.2@92.85,18.67 92.92,18.6 D13.1@94.7,18.6 D14.2@94.7,16.6
NetC51_1: C51.1 CN1.SH1 CN1.SH2 CN1.SH3 CN1.SH4 R46.1 | length 20.2
  TOP w0.4: CN1.SH1@72.73,6.05 72.73,6.458 72.1,7.088 R46.1@72.1,8.8 72.112,8.812 73.088,8.812 C51.1@73.1,8.825
  GND w0.4: CN1.SH1@72.73,6.05 72.73,5.642 72.37,5.282 CN1.SH3@72.37,2.6 CN1.SH4@81.35,2.6 81.35,5.316 80.99,5.676 CN1.SH2@80.99,6.05
NetCN1_A5: CN1.A5 R4.2 | length 8.5
  TOP w0.3: CN1.A5@76.11,7.96 76.11,8.772 v1(76.116,8.778) ; v1(81.6,10.1) R4.2@81.6,11.1
  BOT w0.3: v1(76.116,8.778) 76.17,8.778 76.448,8.5 80.751,8.5 81.6,9.349 v1(81.6,10.1)
NetCN1_B5: CN1.B5 R5.2 | length 9.3
  TOP w0.3: CN1.B5@77.36,6.26 77.36,5.544 77.4,5.504 v1(77.4,5.45) ; v1(82.6,10.15) R5.2@82.6,11.1
  BOT w0.3: v1(77.4,5.45) 77.454,5.45 77.554,5.55 77.605,5.55 80.03,7.975 81.075,7.975 82.2,9.1 82.2,9.75 v1(82.6,10.15)
NetIC1_3: IC1.3 R1.2 | length 1.6
  TOP w0.2: IC1.3@56.339,21.472 56.339,20.061 R1.2@56.45,19.95
NetIC1_7: IC1.7 L1.2
NetIC1_9: IC1.9 L1.1
NetIC2A_5: IC2A.5 R2A.1 | length 1.9
  TOP w0.3: R2A.1@84.95,22.4 84.95,22.475 85.225,22.75 85.3,22.75 85.5,22.95 IC2A.5@85.5,24.05
NetIC2B_5: IC2B.5 R2B.1 | length 1.8
  TOP w0.4: IC2B.5@89.7,33.4 89.8,33.3 90.35,33.3 90.625,33.025 91.075,33.025 R2B.1@91.3,32.8
NetIC2C_5: IC2C.5 R2C.1 | length 2.2
  TOP w0.3: IC2C.5@74.401,58.208 74.551,58.358 74.551,58.851 75.026,59.326 75.026,59.976 R2C.1@75.15,60.1
NetIC2D_5: IC2D.5 R2D.1 | length 1.9
  TOP w0.3: IC2D.5@44.95,46.825 46,46.825 46.25,46.575 46.25,46.55 46.525,46.275 R2D.1@46.6,46.275
NetIC3_17: IC3.17 R20.2 | length 4.8
  TOP w0.2: R20.2@50.6,30.85 50.608,30.858 50.608,31.708 51.6,32.7 53,32.7 53.349,33.049 53.365,33.049 53.415,33.099 IC3.17@53.415,33.687
NetIC3_20: IC3.20 R48.2 | length 6.4
  TOP w0.2: R48.2@51.7,30.85 v1(51.7,31.8) ; IC3.20@54.915,33.687 54.965,33.637 54.965,32.825 55.233,32.557 55.33,32.557 v1(55.388,32.499) v1@55.399,32.499
  BOT w0.2: v1(51.7,31.8) 52.399,32.499 v1(55.388,32.499)
NetIC3_60: IC3.60 R3.2 | length 2.9
  TOP w0.2: R3.2@55,47.85 55,47 55.465,46.535 55.465,45.213 IC3.60@55.415,45.163
NetIC3_61: IC3.61 R19.2 | length 5.2
  TOP w0.2: R19.2@51.3,45.3 51.5,45.5 52.533,45.5 52.533,45.502 52.8,45.769 v1(52.8,45.85) ; v1(54.9,46.3) 54.907,46.293 54.907,45.17 IC3.61@54.915,45.163
  BOT w0.2: v1(52.8,45.85) 54.45,45.85 v1(54.9,46.3)
NetIC4_8: IC4.8 R9.2 R11.2 | length 4.3
  TOP w0.2: IC4.8@77.903,25.375 77.911,25.367 78.614,25.367 79.1,25.853 79.1,26.678 79.3,26.878 79.3,27.6 R9.2@79.5,27.8 R11.2@80.3,27.8
NetIC4_9: IC4.9 R7.1 | length 2.6
  TOP w0.2: IC4.9@77.903,25.875 77.953,25.925 78.478,25.925 78.7,26.147 R7.1@78.7,27.8
NetIC4_17: IC4.17 R8.2 | length 1.8
  TOP w0.2: R8.2@73.15,26.65 73.225,26.65 73.5,26.375 IC4.17@74.803,26.375
NetIC4_18: IC4.18 R6.2 | length 1.7
  TOP w0.2: R6.2@73.15,25.65 73.225,25.65 73.45,25.875 IC4.18@74.803,25.875
NetIC10_4: IC10.4 R34.1 | length 2.1
  TOP w0.2: R34.1@67.4,12.2 67.4,12.899 68.051,13.55 IC10.4@68.55,13.55
NetIC10_6: IC10.6 R37.1 | length 1.3
  TOP w0.2: IC10.6@70.75,13.15 71.2,13.15 71.425,12.925 71.425,12.475 R37.1@71.5,12.4
NetIC10_7: IC10.7 R36.2 | length 2.3
  TOP w0.2: IC10.7@70.75,13.55 71.599,13.55 72.191,12.958 72.191,12.509 R36.2@72.3,12.4
NetIC10_8: IC10.8 R35.1 | length 3
  TOP w0.2: IC10.8@70.75,13.95 71.765,13.95 72.8,12.915 72.8,12.675 72.987,12.488 R35.1@73.025,12.488
NetJ4_1: J4.1 R25.2 R26.2 | length 4.2
  TOP w0.2: J4.1@41.9,40.73 R25.2@41.9,37.55 R26.2@42.9,37.55
NetLED1_2: LED1.2 R10.2 | length 1.8
  TOP w0.3: R10.2@67.7,25.9 67.85,25.75 67.85,25.35 LED1.2@68.7,24.5
NetLED2_2: LED2.2 R12.2 | length 2.6
  TOP w0.3: R12.2@68.8,25.9 68.8,25.825 68.95,25.675 68.969,25.675 69.319,25.325 69.525,25.12 ; 69.525,25.119 70.051,24.594 70.706,24.594 LED2.2@70.8,24.5
NetLED3_1: LED3.1 R14.1 | length 1.6
  TOP w0.3: R14.1@68.1,8.5 68.1,7.45 LED3.1@68.5,7.05
NetLED4_1: LED4.1 R15.1 | length 2
  TOP w0.3: R15.1@69.1,8.5 69.1,8.425 69.25,8.275 69.275,8.275 70.175,7.375 70.45,7.1 LED4.1@70.5,7.1
NetLED5_1: LED5.1 R21.1 | length 4.2
  TOP w0.3: LED5.1@85,7.1 85,11.024 85.076,11.1 R21.1@85.076,11.251
NetLED6_1: LED6.1 R27.1 | length 4.3
  TOP w0.3: LED6.1@83,7.05 83,9.15 83.717,9.867 R27.1@83.717,11.1
NetQ1_1: Q1.1 R24.2 R49.2 | length 2.1
  TOP w0.2: R49.2@80,14.25 R24.2@80.9,14.25 Q1.1@82.1,14.25
NetQ1_3: Q1.3 R21.2 | length 5.3
  TOP w0.3: Q1.3@83.05,16.65 83.05,16.5 83.25,16.3 83.295,16.3 85,14.595 R21.2@85,12.2
NetQ2_1: Q2.1 Q3.1 R28.2 R29.2 | length 9.7
  TOP w0.2: R29.2@42.999,20.251 43.918,20.251 R28.2@43.919,20.25 46.067,20.25 Q2.1@46.117,20.2 50.01,20.2 51.888,18.323 Q3.1@51.888,18.3
NetQ2_3: Q2.3 Q3.3
NetQ4A_3: Q4A.3 Q4A.6 R38A.1 | length 5
  TOP w0.2: Q4A.6@43.6,29 44.736,29 45.25,29.514 45.25,30.3 45.675,30.725 46.025,30.725 Q4A.3@46.2,30.9 ; Q4A.3@46.3,30.95 R38A.1@47.5,30.95
NetQ4A_4: Q4A.4 R39A.1 | length 1.4
  TOP w0.2: R39A.1@42.15,30.9 Q4A.4@43.6,30.9
NetQ4B_3: Q4B.3 Q4B.6 R38B.1 | length 5.4
  TOP w0.2: Q4B.6@43.625,24.25 44.75,24.25 45.375,24.875 45.375,25.599 45.751,25.975 46.05,25.975 Q4B.3@46.225,26.15 47.45,26.15 47.65,26.35 R38B.1@47.65,26.4
NetQ4B_4: Q4B.4 R39B.1 | length 1.4
  TOP w0.2: R39B.1@42.25,26.1 42.3,26.15 Q4B.4@43.625,26.15
NetQ6_1: Q6.1 R16.2 R19.1 | length 1.8
  TOP w0.2: Q6.1@50.05,47.012 50.2,46.862 R16.2@50.2,46.2 R19.1@50.2,45.3
NetQ6_3: Q6.3 R17.2 R18.2 | length 7.1
  TOP w0.2: Q6.3@51,49.388 51.022,49.388 51.259,49.625 55.675,49.625 56.075,49.225 56.1,49.225 56.3,49.025 R18.2@56.3,48.95 R17.2@57.6,48.95 R17.2@57.6,49.025
NetR23_2: R23.2 R47.1 S1.3 | length 5.8
  TOP w0.2: R23.2@100,11.45 R47.1@101,11.45 101,11.375 100.8,11.175 S1.3@100.8,6.75
NetR42_2: R42.2 SB1.2 | length 1.9
  TOP w0.3: SB1.2@93.75,26.1 93.825,26.1 94.1,25.825 94.1,25.75 94.576,25.274 95.026,25.274 R42.2@95.175,25.125
NetR44_2: R44.2 SB1.3 | length 1.8
  TOP w0.3: SB1.3@93.75,23.1 93.825,23.1 94.1,23.375 94.1,23.45 94.45,23.8 R44.2@95.175,23.8
NFC_AC0: C26.2 C27.1 IC9.2 J3.1 J3.2 | length 10.4
  TOP w0.4: IC9.2@99.888,35.175 101.225,35.175 101.41,34.99 101.9,34.99 C27.1@102,34.89 ; C26.2@102,33.91 C27.1@102,34.89 ; J3.1@105.5,37.47 J3.2@105.5,34.1 103.5,34.1 102.71,34.89 C27.1@102,34.89
NFC_AC1: C27.2 C28.1 IC9.3 J3.3 | length 4.9
  TOP w0.4: IC9.3@99.888,35.825 99.895,35.818 101.992,35.818 C27.2@102,35.81 ; C28.1@102,36.79 C27.2@102,35.81 ; J3.3@103.77,35.785 103.758,35.798 102.012,35.798 C27.2@102,35.81
OSC32_IN: C15.1 IC3.3 Y1.2 | length 5.6
  TOP w0.3: Y1.2@46.3,43.25 47.05,42.5 47.34,42.5 C15.1@47.4,42.44 ; C15.1@47.4,42.425 47.475,42.425 47.725,42.175 IC3.3@51.427,42.175
OSC32_OUT: C16.1 IC3.4 Y1.1 | length 5.5
  TOP w0.3: Y1.1@46.3,40.75 47.01,41.46 47.56,41.46 50.06,41.46 50.275,41.675 IC3.4@51.427,41.675
P3V3: C21.2 C22.1 IC4.6 LED3.2 LED4.2 R7.2 R10.1 R12.1 R13.2 | length 45.8
  TOP w0.2: R7.2@78.7,28.9 v1(78.7,29.6) ; C21.2@79.4,23.31 79.49,23.4 v1(80.3,23.4) 80.35,23.45 81.05,23.45 R13.2@81.2,23.3
  TOP w0.3: R10.1@67.7,27 R12.1@68.8,27 68.8,26.925 68.95,26.775 69.182,26.775 69.351,26.606 v1(69.405,26.606) ; LED3.2@68.5,5.55 LED4.2@70.5,5.55 v1(71.4,5.55)
  VCC w0.2: v1(78.7,29.6) 80.35,27.95 80.35,23.45 v1(80.3,23.4)
  BOT w0.3: v1(69.405,26.606) 69.367,26.567 69.367,26.045 69.361,26.039 69.361,25.739 71.7,23.4 73.5,23.4 ; v1(71.4,5.55) 71.4,11.2 73.5,13.3 73.5,23.4 ; v1(80.3,23.4) 73.5,23.4
PS1: IC2D.3 IC3.51 R30.2 | length 41
  TOP w0.2: v1(41.5,45.3) 41.575,45.3 42.15,45.875 IC2D.3@42.45,45.875 ; IC3.51@59.915,45.163 59.965,45.213 59.965,46.025 60.315,46.375 63.65,46.375 65.1,47.825 65.1,47.9 R30.2@65.15,47.85 ; R30.2@65.2,47.85 v1(65.9,47.85)
  BOT w0.2: v1(41.5,45.3) 55.6,45.3 56.2,45.9 68.5,45.9 68.9,46.3 68.9,47.5 68.55,47.85 v1(65.9,47.85)
PS2: IC2C.3 IC3.52 R31.2 | length 21.9
  TOP w0.2: IC3.52@59.415,45.163 59.465,45.213 59.465,46.09 60.15,46.775 63.171,46.775 63.518,47.122 63.518,47.756 R31.2@63.531,47.769 ; R31.2@63.7,47.9 63.7,47.925 63.9,48.125 64.075,48.125 64.393,48.443 64.393,48.935 v1(64.45,48.993) ; IC2C.3@75.351,55.708 75.4,55.659 v1(75.4,54.719)
  VCC w0.2: v1(64.45,48.993) 64.757,49.3 68.5,49.3 73.919,54.719 v1(75.4,54.719)
PS3: IC2B.3 IC3.53 R32.2 | length 44.8
  TOP w0.2: IC3.53@58.915,45.163 58.965,45.213 58.965,46.165 59.975,47.175 61.7,47.175 R32.2@62.3,47.775 ; R32.2@62.3,47.85 R32.2@62.3,47.775 ; v1(62.95,47.75) 62.325,47.75 R32.2@62.3,47.775 ; v1(67.1,31.45) 67.181,31.45 67.431,31.2 85.65,31.2 86.7,32.25 86.788,32.338 IC2B.3@87.588,32.338
  VCC w0.2: v1(62.95,47.75) 62.95,35.6 v1(67.1,31.45)
PS4: IC2A.3 IC3.54 R33.2 | length 45
  TOP w0.2: IC3.54@58.415,45.163 58.415,46.181 59.809,47.575 60.6,47.575 60.976,47.951 60.976,47.75 61,47.726 v1(61.474,47.726) ; v1(66.2,31.45) 66.2,31.372 66.772,30.8 82.6,30.8 83.9,29.5 83.9,27.5 84.35,27.05 84.35,26.75 IC2A.3@84.55,26.55
  VCC w0.2: v1(61.474,47.726) 62.5,46.7 62.5,35.15 v1(66.2,31.45)
RESE: J9.3 Q5.2 SB1.1 | length 18.2
  TOP w0.25: Q5.2@90,24.7 90.225,24.475 90.225,24.262 90.612,23.875 92.95,23.875 93.675,24.6 SB1.1@93.75,24.6 92.925,25.425 92.925,26.66 94.24,27.975 103.302,27.975 103.675,27.975 J9.3@103.7,28
RF_CS: IC3.41 RN1.14 | length 27.8
  TOP w0.2: IC3.41@62.903,39.675 63.94,39.675 64.166,39.9 v1(65.2,39.9) ; v1(82.128,55.972) 82.175,56.018 82.175,57.625 RN1.14@82.2,57.65
  BOT w0.2: v1(65.2,39.9) 66.269,39.9 82.071,55.702 82.071,55.914 v1(82.128,55.972)
RF_GPIO0: IC3.39 RN1.16 | length 29.5
  TOP w0.2: IC3.39@62.903,38.675 64.994,38.675 65.119,38.8 v1(65.2,38.8) ; RN1.16@83.287,57.65 83.287,56.9 83.425,56.762 83.425,55.925 v1(83.4,55.9)
  BOT w0.2: v1(65.2,38.8) 65.25,38.75 66.25,38.75 v1(83.4,55.9)
RF_GPIO1: IC3.37 RN2.1 | length 31.3
  TOP w0.2: IC3.37@62.903,37.675 63.94,37.674 65.661,35.953 v1(65.675,35.953) ; RN2.1@83.437,49.1 83.543,49.206 83.543,49.843 v1(83.6,49.9)
  BOT w0.2: v1(65.675,35.953) 65.718,35.953 66.465,36.7 72.4,36.7 75.5,39.8 79.1,39.8 80.1,40.8 80.1,46.2 83.543,49.643 83.543,49.843 v1(83.6,49.9)
RF_GPIO2: IC3.38 RN2.2 | length 30.2
  TOP w0.2: IC3.38@62.903,38.175 64.217,38.175 v1(65.62,36.772) ; RN2.2@82.85,49.1 82.85,49.225 82.875,49.25 82.875,49.599 83,49.724 v1(83,50.5)
  BOT w0.2: v1(65.62,36.772) 65.948,37.1 72.2,37.1 75.3,40.2 76.8,40.2 77.5,40.9 77.5,44.224 83,49.724 v1(83,50.5)
RF_MISO: IC3.35 RN1.12 | length 34.8
  TOP w0.2: v1(60.7,36.7) 60.713,36.687 62.89,36.687 IC3.35@62.903,36.675 ; v1(80.963,55.937) 80.982,55.957 80.982,56.816 81.2,57.034 RN1.12@81.2,57.65
  BOT w0.2: v1(60.7,36.7) 60.73,36.67 61.417,36.67 61.9,37.153 61.9,41.3 64.9,44.3 69.4,44.3 80.963,55.863 v1(80.963,55.937)
RF_MOSI: IC3.36 RN1.11 | length 32.7
  TOP w0.2: v1(61.297,37.328) 61.378,37.328 61.531,37.175 IC3.36@62.903,37.175 ; v1(80.432,56.67) 80.432,56.751 80.547,56.866 80.547,56.947 80.7,57.1 RN1.11@80.7,57.65
  BOT w0.2: v1(61.297,37.328) 61.297,41.397 64.6,44.7 69.2,44.7 80.413,55.913 80.413,56.651 v1(80.432,56.67)
RF_RTS: IC3.40 RN1.15 | length 28.7
  TOP w0.2: IC3.40@62.903,39.175 64.797,39.175 64.972,39.35 65.85,39.35 v1(65.881,39.319) ; RN1.15@82.7,57.65 82.7,56.79 82.809,56.681 v1(82.809,56.6)
  BOT w0.2: v1(65.881,39.319) 65.938,39.377 66.311,39.377 82.85,55.916 82.85,56.559 v1(82.809,56.6)
RF_RX: IC3.43 RN2.3 | length 30
  TOP w0.2: IC3.43@62.903,40.675 62.953,40.725 64.047,40.725 v1(64.359,41.036) ; RN2.3@82.35,49.1 82.375,49.125 82.375,49.877 v1(82.426,49.928)
  BOT w0.2: v1(64.359,41.036) 64,40.678 64,38.3 64.6,37.7 71.8,37.7 75,40.9 75,42.502 v1(82.426,49.928)
RF_SCK: IC3.34 RN1.13 | length 34.1
  TOP w0.2: v1(61.4,36.087) 61.444,36.131 62.859,36.131 IC3.34@62.903,36.175 ; v1(81.572,56.624) 81.572,56.705 81.7,56.834 81.7,57.646 RN1.13@81.704,57.65
  BOT w0.2: v1(61.4,36.087) 62.4,37.087 62.4,41.078 65.222,43.9 69.703,43.9 81.565,55.762 81.565,56.618 v1(81.572,56.624)
RF_TX: IC3.42 RN2.4 | length 30.2
  TOP w0.2: IC3.42@62.903,40.175 63.875,40.175 64.025,40.325 64.748,40.325 65.2,40.777 v1(65.2,40.8) ; v1(81.8,50.5) 81.85,50.45 RN2.4@81.85,49.1
  BOT w0.2: v1(65.2,40.8) 64.5,40.1 64.5,38.6 64.85,38.25 70.75,38.25 72.6,40.1 72.6,42.1 73.4,42.9 74.2,42.9 v1(81.8,50.5)
RST: C30.2 IC3.7 K1.10 R26.1 | length 42.2
  TOP w0.2: R26.1@42.9,36.45 C30.2@43.9,36.45 44.4,36.45 46.175,38.225 49.775,38.225 50.389,38.839 50.389,39.949 50.565,40.125 50.672,40.125 51.377,40.125 51.477,40.225 52.289,40.225 52.505,40.441 52.964,40.9 v1(54.5,40.9)
  BOT w0.2: v1(54.5,40.9) 60.6,34.8 65.9,34.8 67,35.9 72.933,35.9 73.533,36.5 78.16,36.5 K1.10@79.04,35.62
SCL: IC3.58 IC6.9 IC7.2 IC8.6 IC9.6 R17.1 RN2.5 | length 90.7
  TOP w0.2: IC6.9@53,56.3 53.3,56 v1(53.3,52.9) ; v1(54.8,52.9) 54.85,52.85 56.25,52.85 57.9,54.5 57.9,57.641 ; IC3.58@56.415,45.163 56.415,46.265 57.25,47.1 v1(57.3,47.1) 57.3,47.181 57.4,47.281 57.4,47.65 R17.1@57.6,47.85 ; IC7.2@59.837,57.641 57.9,57.641 ; IC8.6@63.05,62.75 64.1,62.75 64.5,62.35 64.5,60.7 64,60.2 59.9,60.2 57.9,58.2 57.9,57.641 ; v1(67.475,47.125) 70.65,50.3 74.9,50.3 77.2,52.6 v1(82.072,52.6) 82.072,51.772 81.25,50.95 81.25,50.15 81.35,50.05 RN2.5@81.35,49.1 ; v1(91.8,35.8) 91.813,35.813 93.999,35.813 IC9.6@94.012,35.825
  BOT w0.2: v1(53.3,52.9) v1(54.8,52.9) 57.3,50.4 v1(57.3,47.1) 57.312,47.112 67.462,47.112 v1(67.475,47.125) ; v1(82.072,52.6) 84.3,52.6 85.8,51.1 85.8,43.9 87.6,42.1 87.6,40 v1(91.8,35.8)
SDA: IC3.59 IC6.10 IC7.1 IC8.3 IC9.5 R18.1 RN2.6 | length 82.7
  TOP w0.2: v1(54.2,52.2) 54.2,53.6 ; IC6.10@54.2,56.95 54.2,53.6 ; IC3.59@55.915,45.163 55.907,45.17 55.907,46.707 v1(56.3,47.1) R18.1@56.3,47.85 ; v1(59,58.45) 59.004,58.446 59.833,58.446 IC7.1@59.837,58.441 ; IC8.3@60.55,61.15 60.542,61.142 59.992,61.142 v1(57.3,58.45) 57.3,55.05 55.85,53.6 54.2,53.6 ; v1(68.2,46.6) 71.4,49.8 75.2,49.8 77.3,51.9 v1(80.9,51.9) 80.85,51.85 RN2.6@80.85,49.1 ; v1(89.9,36.4) 89.938,36.438 93.974,36.438 IC9.5@94.012,36.475
  BOT w0.2: v1(54.2,52.2) 56.3,50.1 v1(56.3,47.1) 56.85,46.55 68.15,46.55 v1(68.2,46.6) ; v1(57.3,58.45) v1(59,58.45) ; v1(80.9,51.9) 80.95,51.95 84.05,51.95 85.2,50.8 85.2,41.1 v1(89.9,36.4)
SOLAR_IN: D8.2 J5.1 | length 19
  TOP w0.4: D8.2@74.625,18.3 v2(75.4,18.3)
  VCC w0.4: v2(75.4,18.3) 76.4,18.3 J5.1@88.55,6.15
STAT1: IC10.9 R14.2 R20.1 | length 42.2
  TOP w0.2: v1(49.9,28.2) 50.6,28.9 R20.1@50.6,29.75 ; R14.2@68.1,9.6 68.181,9.681 v1(68.181,10.3) ; IC10.9@70.75,14.35 72.15,14.35 v1(72.2,14.3)
  BOT w0.2: v1(49.9,28.2) 51.278,28.2 51.978,27.5 66.5,27.5 68.7,25.3 68.7,17.8 v1(72.2,14.3) ; v1(68.181,10.3) 68.2,10.302 v1@72.198,14.3
STAT2: IC10.3 R15.2 R48.1 | length 43.3
  TOP w0.2: v1(51.3,27.1) 51.75,27.55 51.75,29.7 R48.1@51.7,29.75 ; v1(66.069,13.305) 66.127,13.247 67.172,13.247 67.874,13.95 67.885,13.95 IC10.3@68.55,13.95 ; R15.2@69.1,9.6 v1(69.9,9.6)
  VCC w0.2: v1(66.069,13.305) 66.069,11.553 68.022,9.6 v1(69.9,9.6)
  BOT w0.2: v1(51.3,27.1) 66.2,27.1 68.3,25 68.3,15.536 v1(66.069,13.305)
SWDCLK: IC3.49 K1.4 | length 22.6
  TOP w0.2: IC3.49@60.915,45.163 60.915,45.75 61.065,45.9 65.9,45.9 67.8,44 67.8,38.2 69,37 73.85,37 K1.4@75.23,35.62
SWDIO: IC3.46 K1.2 | length 15.5
  TOP w0.2: IC3.46@62.903,42.175 62.948,42.13 63.77,42.13 64.25,41.65 66.117,41.65 67.1,40.667 67.1,37.8 68.6,36.3 73.28,36.3 K1.2@73.96,35.62
USB1_N: CN1.A7 CN1.B7 IC5.3 | length 5.5
  TOP w0.3: v1(76.2,7.05) 76.36,6.46 CN1.B7@76.36,6.26 ; v1(77.287,7.306) 77.11,7.76 CN1.A7@77.11,7.96 cw(c77.139,7.986) 77.1,7.986 77.1,8.954 77.269,9.143 ccw(c75.531,10.523) IC5.3@77.746,10.65
  BOT w0.3: v1(76.2,7.05) 76.67,7.05 ccw(c76.67,7.922) v1(77.287,7.306)
USB1_P: CN1.A6 CN1.B6 IC5.1 | length 4.6
  TOP w0.3: IC5.1@75.85,10.65 75.896,10.2 ccw(c78.092,10.65) 76.198,9.45 ccw(c78.092,10.65) 76.251,9.371 76.541,9.08 76.62,8.974 76.62,7.989 cw(c76.581,7.989) 76.61,7.963 CN1.A6@76.608,7.962 ; CN1.A6@76.61,7.96 76.61,7.76 76.86,6.46 CN1.B6@76.86,6.26
USB2_N: IC4.5 IC5.4 | length 11.1
  TOP w0.3: IC4.5@77.103,24.075 77.103,14.453 77.286,14.271 cw(c76.165,13.15) IC5.4@77.75,13.15
USB2_P: IC4.4 IC5.6 | length 11.2
  TOP w0.3: IC5.6@75.85,13.15 cw(c77.128,13.15) 76.224,14.054 76.62,14.45 IC4.4@76.62,24.058
USB_ON: IC3.16 R13.1 R45.2 | length 44.9
  TOP w0.2: v1(50.9,33.8) 50.9,33.867 50.7,34.067 50.7,35.535 50.839,35.675 IC3.16@51.427,35.675 ; R13.1@81.2,22.2 R45.2@82.2,22.2 82.3,22.1 v1(82.3,21.4)
  BOT w0.2: v1(50.9,33.8) 50.9,31.7 53.6,29 70.1,29 72,27.1 81.2,27.1 82.3,26 v1(82.3,21.4)
VBAT_LI: C38.1 IC10.2 J6.1
VBAT_LI_IN: J6.2 J7.1 Q4A.2 R38A.2 | length 18.5
  TOP w0.2: Q4A.2@46.2,29.95 47.45,29.95 R38A.2@47.6,30.1 47.6,30.05 47.8,29.85 v1(48.5,29.85)
  VCC w0.2: v1(48.5,29.85) 49.15,29.85 50.75,28.25 50.75,17.89 J6.2@52.69,15.95
VBAT_SO: J8.1 Q2.2
VBAT_SO_IN: BT1.MH1 J8.2 Q4B.2 R38B.2 | length 13.6
  TOP w0.2: Q4B.2@46.225,25.2 46.325,25.3 R38B.2@47.65,25.3 47.7,25.35 v1(48.4,25.35)
  VCC w0.2: J8.2@43.66,15.95 47.8,20.09 47.8,24.75 v1(48.4,25.35)
VBUS: C50.2 CN1.A4 CN1.A9 CN1.B4 CN1.B9 D6.1 FB2.1 IC5.5 | length 17.4
  TOP w0.3: CN1.B9@75.36,6.26 75.36,7.215 75.61,7.465 75.61,7.489 CN1.A4@75.61,7.96 75.61,8.435 75.61,8.455 75.4,8.665 v2(75.4,9.5) ; CN1.B4@77.86,6.26 77.86,7.06 78.11,7.31 CN1.A9@78.11,7.96 78.11,9.04 78.1,9.05 v2(78.1,9.15)
  TOP w0.4: IC5.5@76.8,13.15 76.9,13.05 76.9,12.65 77.475,12.075 78.875,12.075 78.875,11.841 D6.1@78.875,10.35 78.8,10.275 78.8,9.85 v2(78.1,9.15) ; 78.867,12.075 78.867,12.816 78.85,12.833 78.85,13.075 C50.2@78.825,13.1 78.825,14.05 FB2.1@78.9,14.125
  BOT w0.4: v2(75.4,9.5) 76.313,9.5 76.701,9.112 78.062,9.112 v2(78.1,9.15)
VCCD: C36.1 C37.1 D10.2 IC10.1 R28.1 | length 25.5
  TOP w0.2: v1(43.919,18.381) R28.1@43.919,19.15
  BOT w0.2: v1@43.824,18.476 44.3,18 65.75,18 v1(67.6,19.85)
VCOM: C49.1 J9.24 | length 2.8
  TOP w0.3: C49.1@101.55,16.1 101.55,16.195 101.775,16.42 102.12,16.42 103.2,17.5 J9.24@103.7,17.5
VDC: C34.1 C35.1 D8.1 D9.1 IC10.10
VDD: C44.1 J9.18 | length 3.8
  TOP w0.25: C44.1@101.55,22.9 101.55,22.805 101.803,22.552 102.003,22.552 102.271,22.284 102.271,21.32 102.875,20.716 ; 102.875,20.715 103.065,20.525 103.675,20.525 J9.18@103.7,20.5
VDDA: FB1.2 IC3.13 | length 2.3
  TOP w0.3: FB1.2@49.2,37.1 49.275,37.175 IC3.13@51.427,37.175
VGH: C46.1 D12.1 J9.21 | length 6.5
  TOP w0.25: D12.1@98.2,20.6 98.475,20.875 98.771,20.875 98.796,20.9 100.845,20.9 101.55,20.195 C46.1@101.55,20.1 101.55,20.005 101.8,19.755 102,19.755 102.755,19 J9.21@103.7,19
VGL: C48.1 D13.2 J9.23 | length 6.4
  TOP w0.25: D13.2@98.2,18.6 98.375,18.6 98.65,18.325 98.65,18.241 98.796,18.095 100.85,18.095 101.55,17.395 C48.1@101.55,17.3 102.3,17.3 103,18 J9.23@103.7,18
VIN: C5.1 C31.1 C32.1 C33.1 D10.1 IC1.1 IC1.2 IC1.10 J2.7 Q3.2 | length 34.4
  TOP w0.2: v1(53.822,20.825) 53.847,20.85 55.207,20.85 ; IC1.1@55.339,21.472 55.289,21.422 55.289,20.932 55.207,20.85 ; IC1.2@55.839,21.472 55.789,21.422 55.789,20.948 55.691,20.85 55.289,20.85 55.207,20.85
  VCC w0.2: v1(52.9,24.125) 52.925,24.1 52.925,21.722 v1(53.822,20.825)
  VCC w0.4: v2(65.701,25.65) 72.51,32.459 72.51,40.41 J2.7@73.9,41.8
  BOT w0.4: v2(63.475,18.675) 65.701,20.901 v2(65.701,25.65)
VSH: C45.1 J9.20 | length 3.4
  TOP w0.25: C45.1@101.55,21.7 101.8,21.45 101.8,21.155 102.25,20.705 102.25,20.34 103.065,19.525 J9.20@103.675,19.525
VSH2: C42.1 J9.5 | length 2.1
  TOP w0.3: C42.1@101.6,27.1 101.7,27 J9.5@103.7,27
VSL: C47.1 J9.22 | length 2.3
  TOP w0.25: C47.1@101.55,18.9 101.704,18.746 102.154,18.746 102.4,18.5 J9.22@103.7,18.5
pads on no net: *FD1. *FD1.0 *FD2. *FD2.0 BT1.1 BT1.2 CN1.0 CN1.A2 CN1.A3 CN1.A8 CN1.A10 CN1.A11 CN1.B2 CN1.B3 CN1.B8 CN1.B10 CN1.B11 D2.1 D2.9 D3.5 D3.6 IC3.2 IC3.5 IC3.6 IC3.33 IC3.44 IC3.45 IC3.50 IC3.62 IC4.1 IC4.2 IC4.10 IC4.11 IC4.13 IC4.14 IC4.15 IC4.16 IC6.1 IC6.2 IC6.3 IC6.4 IC6.5 IC6.8 IC6.11 IC6.12 IC6.13 IC6.14 IC6.15 IC6.16 IC6.17 IC6.18 IC9.1 J6. J7.3 J7.4 J8. J9.1 J9.4 J9.6 J9.7 J9.19 K1.6 K1.7 K1.8 MH1. MH2. MH3. MH4. RN1.7 RN1.8 RN1.9 RN1.10 RN2.7 RN2.8 RN2.9 RN2.10
copper on no net: | length 44.2
  TOP w0.2: 2.75,9.9 4.45,9.9 4.45,13.729 2.75,13.729 2.75,9.9
  GND w0.2: 2.75,9.9 4.45,9.9 4.45,13.729 2.75,13.729 2.75,9.9
  VCC w0.2: 2.75,9.9 2.75,13.729 4.45,13.729 4.45,9.9 2.75,9.9
  BOT w0.2: 2.75,9.9 2.75,13.729 4.45,13.729 4.45,9.9 2.75,9.9

## Polygon pours and split planes (outlines as drawn)
3V3 on VCC "NONET_L01_P-001" (solid, remove dead copper, shelved, pour order 2): 0,1.27 0,65.73 cw(c1.27,65.73) 1.27,67 39.73,67 cw(c39.73,65.73) 41,65.73 41,52.52 ccw(c42.27,52.52) 42.27,51.25 47.73,51.25 ccw(c47.73,52.52) 49,52.52 49,52.98 ccw(c47.73,52.98) 47.73,54.25 45.77,54.25 cw(c45.77,55.52) 44.5,55.52 44.5,65.73 cw(c45.77,65.73) 45.77,67 64.43,67 cw(c64.43,65.73) 65.7,65.73 65.7,55.52 cw(c64.43,55.52) 64.43,54.25 62.47,54.25 ccw(c62.47,52.98) 61.2,52.98 61.2,52.52 ccw(c62.47,52.52) 62.47,51.25 67.43,51.25 ccw(c67.43,52.52) 68.7,52.52 68.7,65.73 cw(c69.97,65.73) 69.97,67 108,67 109.23,67 cw(c109.23,65.73) 110.5,65.73 110.5,1.27 cw(c109.23,1.27) 109.23,0 67,0 ccw(c65.879,0) 65.879,1.121 60.121,1.121 ccw(c60.121,0) 59,0 1.27,0 cw(c1.27,1.27)
GND on TOP "NONET_L01_P-001" (solid, remove dead copper, shelved, pour order 3): 0,1.27 0,65.73 cw(c1.27,65.73) 1.27,67 39.73,67 cw(c39.73,65.73) 41,65.73 41,52.52 ccw(c42.27,52.52) 42.27,51.25 47.73,51.25 ccw(c47.73,52.52) 49,52.52 49,52.98 ccw(c47.73,52.98) 47.73,54.25 45.77,54.25 cw(c45.77,55.52) 44.5,55.52 44.5,65.73 cw(c45.77,65.73) 45.77,67 64.43,67 cw(c64.43,65.73) 65.7,65.73 65.7,55.52 cw(c64.43,55.52) 64.43,54.25 62.47,54.25 ccw(c62.47,52.98) 61.2,52.98 61.2,52.52 ccw(c62.47,52.52) 62.47,51.25 67.43,51.25 ccw(c67.43,52.52) 68.7,52.52 68.7,65.73 cw(c69.97,65.73) 69.97,67 108,67 109.23,67 cw(c109.23,65.73) 110.5,65.73 110.5,1.27 cw(c109.23,1.27) 109.23,0 67,0 ccw(c65.879,0) 65.879,1.121 60.121,1.121 ccw(c60.121,0) 59,0 1.27,0 cw(c1.27,1.27)
GND on BOT "NONET_L01_P-001" (solid, remove dead copper, shelved, pour order 1): 0,1.27 0,65.73 cw(c1.27,65.73) 1.27,67 39.73,67 cw(c39.73,65.73) 41,65.73 41,52.52 ccw(c42.27,52.52) 42.27,51.25 47.73,51.25 ccw(c47.73,52.52) 49,52.52 49,52.98 ccw(c47.73,52.98) 47.73,54.25 45.77,54.25 cw(c45.77,55.52) 44.5,55.52 44.5,65.73 cw(c45.77,65.73) 45.77,67 64.43,67 cw(c64.43,65.73) 65.7,65.73 65.7,55.52 cw(c64.43,55.52) 64.43,54.25 62.47,54.25 ccw(c62.47,52.98) 61.2,52.98 61.2,52.52 ccw(c62.47,52.52) 62.47,51.25 67.43,51.25 ccw(c67.43,52.52) 68.7,52.52 68.7,65.73 cw(c69.97,65.73) 69.97,67 108,67 109.23,67 cw(c109.23,65.73) 110.5,65.73 110.5,1.27 cw(c109.23,1.27) 109.23,0 67,0 ccw(c65.879,0) 65.879,1.121 60.121,1.121 ccw(c60.121,0) 59,0 1.27,0 cw(c1.27,1.27)
GND on GND "NONET_L01_P-001" (solid, remove dead copper, shelved, pour order 0): 0,1.27 0,65.73 cw(c1.27,65.73) 1.27,67 39.73,67 cw(c39.73,65.73) 41,65.73 41,52.52 ccw(c42.27,52.52) 42.27,51.25 47.73,51.25 ccw(c47.73,52.52) 49,52.52 49,52.98 ccw(c47.73,52.98) 47.73,54.25 45.77,54.25 cw(c45.77,55.52) 44.5,55.52 44.5,65.73 cw(c45.77,65.73) 45.77,67 64.43,67 cw(c64.43,65.73) 65.7,65.73 65.7,55.52 cw(c64.43,55.52) 64.43,54.25 62.47,54.25 ccw(c62.47,52.98) 61.2,52.98 61.2,52.52 ccw(c62.47,52.52) 62.47,51.25 67.43,51.25 ccw(c67.43,52.52) 68.7,52.52 68.7,65.73 cw(c69.97,65.73) 69.97,67 108,67 109.23,67 cw(c109.23,65.73) 110.5,65.73 110.5,1.27 cw(c109.23,1.27) 109.23,0 67,0 ccw(c65.879,0) 65.879,1.121 60.121,1.121 ccw(c60.121,0) 59,0 1.27,0 cw(c1.27,1.27)